# EAGLE board Original LIP 18.05 (EAGLE 9.7.0)

Size 342.54 x 364.36 mm. Coordinates in mm from the lower left corner, seen from the top.
Outline: 0,0 342.54,0 342.54,364.36 0,364.36 0,0
Copper layers (1*16): Top 0.035mm / dielectric 1.5mm / Bottom 0.035mm
Design rules "default": minimum track width 6mil, minimum drill 0.35mm, track to track 6mil, track to pad 6mil, pad to pad 6mil, via to via 6mil, smd to smd 6mil, copper to edge 40mil, drill to drill 6mil, minimum pad ring 10mil, minimum via ring 8mil, stop-mask expansion 4mil, vias tented up to drill 0mil, thermal gap 10mil

## Footprints (pad centres in the part's own frame; a part is rotated, then mirrored left to right if it is on the bottom)
LEDRD254W60D565H860B_Y = drill 0.981 pad 1.581: 1 -1.27,0; 2 1.27,0
LEDRD254W60D565H860B_G = drill 0.981 pad 1.581: 1 -1.27,0; 2 1.27,0
RESAD1016W63L850D250B = drill 0.83 pad 1.43: 1 -5.08,0; 2 5.08,0
SWITCH-MOMENTARY-PTH-6.5MM = drill 1.016 pad 1.88: 1 -3.251,2.261; 2 3.251,2.261; 3 -3.251,-2.261; 4 3.251,-2.261
ARDUINO-UNO-R3-SHIELD = drill 1.016 pad 1.88: 3.3V 24.13,-2.54; 5V 24.13,0; A0 24.13,12.7; A1 24.13,15.24; A2 24.13,17.78; A3 24.13,20.32; A4 24.13,22.86; A5 24.13,25.4; AREF -24.13,-13.97; D2 -24.13,20.32; D3 -24.13,17.78; D4 -24.13,15.24; D5 -24.13,12.7; D6 -24.13,10.16; D7 -24.13,7.62; D8 -24.13,3.81; D9 -24.13,1.27; D10 -24.13,-1.27; D11 -24.13,-3.81; D12 -24.13,-6.35; D13 -24.13,-8.89; GND@0 24.13,2.54; GND@1 24.13,5.08; GND@2 -24.13,-11.43; IOREF 24.13,-7.62; NC 24.13,-10.16; RES 24.13,-5.08; RX -24.13,25.4; SCL -24.13,-19.05; SDA -24.13,-16.51; TX -24.13,22.86; VIN 24.13,7.62

## Placement (x,y rotation side)
D1  YELLOW  [LEDRD254W60D565H860B_Y]  56.76,354.9 180 top
D2  GREEN  [LEDRD254W60D565H860B_G]  6.06,356.45 180 top
R1  200  [RESAD1016W63L850D250B]  79.39,352.26 90 top
R2  1k  [RESAD1016W63L850D250B]  336.21,8.97 90 top
R3  10k  [RESAD1016W63L850D250B]  303.12,271.54 90 top
R4  10k  [RESAD1016W63L850D250B]  287.2,271.95 90 top
R5  200  [RESAD1016W63L850D250B]  27.73,353.27 90 top
S1  SWITCH_MOMENTARY  [SWITCH-MOMENTARY-PTH-6.5MM]  289.78,286.99 90 top
S2  SWITCH_MOMENTARY  [SWITCH-MOMENTARY-PTH-6.5MM]  306.86,286.45 90 top
U1  ARDUINO-UNO-R3-SHIELD  [ARDUINO-UNO-R3-SHIELD]  98.84,288.74 270 top
U3  ARDUINO-UNO-R3-SHIELD  [ARDUINO-UNO-R3-SHIELD]  226.99,290.59 270 top

## Library data of the parts
D1 = Tinkercad; CATEGORY: Opto-Electronic; SUB-CATEGORY: LED; VALUE: LED_YELLOW
D2 = Tinkercad; CATEGORY: Opto-Electronic; SUB-CATEGORY: LED; VALUE: LED_GREEN
R1-R5 S1 S2 U1 U3 = Tinkercad

## Nets
D1_A: D1.1 R1.2
D2_A: D2.1 R5.2
U1_D3: R1.1 R4.2 S1.1 S1.2 U1.D3 U3.D8
U1_GND: D1.2 D2.2 R3.1 R4.1 U1.GND@0 U1.GND@1 U1.GND@2 U3.GND@0 U3.GND@1 U3.GND@2
U3_5V: S1.3 S2.3 U3.5V
U3_D9: R3.2 R5.1 S2.1 S2.2 U1.D2 U3.D9

## Tracks (layer width: path | path; a pad name or v marks a point on that pad's centre or on a via)
D1_A  (1 unrouted)
D2_A  (1 unrouted)
U1_D3  (5 unrouted)
U1_GND  (9 unrouted)
U3_5V  (2 unrouted)
U3_D9  (5 unrouted)